# EAGLE board CT_schematic (EAGLE 7.6.0)

Size 100 x 80 mm. Coordinates in mm from the lower left corner, seen from the top.
Outline: 0,0 100,0 100,80 0,80 0,0
Copper layers (1*16): Top 0.035mm / dielectric 1.5mm / Bottom 0.035mm
Design rules "default": minimum track width 10mil, minimum drill 24mil, track to track 8mil, track to pad 8mil, pad to pad 8mil, via to via 8mil, smd to smd 8mil, copper to edge 40mil, drill to drill 8mil, minimum pad ring 10mil, minimum via ring 8mil, stop-mask expansion 4mil, vias tented up to drill 0mil, thermal gap 10mil

## Footprints (pad centres in the part's own frame; a part is rotated, then mirrored left to right if it is on the bottom)
C0603 = smd 0.8 x 0.8: 1 -0.762,0; 2 0.762,0
C0402 = smd 0.5 x 0.5: 1 -0.508,0; 2 0.508,0
C0805 = smd 1.2 x 1.3: 1 -1.016,0; 2 1.016,0
C1206 = smd 1.3 x 1.6: 1 -1.524,0; 2 1.524,0
2220 = smd 1.85 x 5.5: 1 -2.55,0; 2 2.55,0
R0603 = smd 0.8 x 0.8: 1 -0.762,0; 2 0.762,0
EXV-9H = smd 3.505 x 1.676: 1 -2.857,0; 2 2.857,0
L0603 = smd 0.8 x 0.8: 1 -0.762,0; 2 0.762,0
L1210 = smd 1.2 x 2.5: 1 -1.524,0; 2 1.524,0
DR1040 = smd 1.6 x 3.2: 1 -4.458,0; 2 4.458,0
PJ-037B_PACKAGE = drill 3.7 square: 1 12,0 | drill 3.2 square: 2 6,0
LQFP176 = smd 0.3 x 1.2: 1 -10.75,-12.75; 2 -10.25,-12.75; 3 -9.75,-12.75; 4 -9.25,-12.75; 5 -8.75,-12.75; 6 -8.25,-12.75; 7 -7.75,-12.75; 8 -7.25,-12.75; 9 -6.75,-12.75; 10 -6.25,-12.75; 11 -5.75,-12.75; 12 -5.25,-12.75; 13 -4.75,-12.75; 14 -4.25,-12.75; 15 -3.75,-12.75; 16 -3.25,-12.75; 17 -2.75,-12.75; 18 -2.25,-12.75; 19 -1.75,-12.75; 20 -1.25,-12.75; 21 -0.75,-12.75; 22 -0.25,-12.75; 23 0.25,-12.75; 24 0.75,-12.75; 25 1.25,-12.75; 26 1.75,-12.75; 27 2.25,-12.75; 28 2.75,-12.75; 29 3.25,-12.75; 30 3.75,-12.75; 31 4.25,-12.75; 32 4.75,-12.75; 33 5.25,-12.75; 34 5.75,-12.75; 35 6.25,-12.75; 36 6.75,-12.75; 37 7.25,-12.75; 38 7.75,-12.75; 39 8.25,-12.75; 40 8.75,-12.75; 41 9.25,-12.75; 42 9.75,-12.75; 43 10.25,-12.75; 44 10.75,-12.75; 89 10.75,12.75; 90 10.25,12.75; 91 9.75,12.75; 92 9.25,12.75; 93 8.75,12.75; 94 8.25,12.75; 95 7.75,12.75; 96 7.25,12.75; 97 6.75,12.75; 98 6.25,12.75; 99 5.75,12.75; 100 5.25,12.75; 101 4.75,12.75; 102 4.25,12.75; 103 3.75,12.75; 104 3.25,12.75; 105 2.75,12.75; 106 2.25,12.75; 107 1.75,12.75; 108 1.25,12.75; 109 0.75,12.75; 110 0.25,12.75; 111 -0.25,12.75; 112 -0.75,12.75; 113 -1.25,12.75; 114 -1.75,12.75; 115 -2.25,12.75; 116 -2.75,12.75; 117 -3.25,12.75; 118 -3.75,12.75; 119 -4.25,12.75; 120 -4.75,12.75; 121 -5.25,12.75; 122 -5.75,12.75; 123 -6.25,12.75; 124 -6.75,12.75; 125 -7.25,12.75; 126 -7.75,12.75; 127 -8.25,12.75; 128 -8.75,12.75; 129 -9.25,12.75; 130 -9.75,12.75; 131 -10.25,12.75; 132 -10.75,12.75 | smd 1.2 x 0.3: 45 12.75,-10.75; 46 12.75,-10.25; 47 12.75,-9.75; 48 12.75,-9.25; 49 12.75,-8.75; 50 12.75,-8.25; 51 12.75,-7.75; 52 12.75,-7.25; 53 12.75,-6.75; 54 12.75,-6.25; 55 12.75,-5.75; 56 12.75,-5.25; 57 12.75,-4.75; 58 12.75,-4.25; 59 12.75,-3.75; 60 12.75,-3.25; 61 12.75,-2.75; 62 12.75,-2.25; 63 12.75,-1.75; 64 12.75,-1.25; 65 12.75,-0.75; 66 12.75,-0.25; 67 12.75,0.25; 68 12.75,0.75; 69 12.75,1.25; 70 12.75,1.75; 71 12.75,2.25; 72 12.75,2.75; 73 12.75,3.25; 74 12.75,3.75; 75 12.75,4.25; 76 12.75,4.75; 77 12.75,5.25; 78 12.75,5.75; 79 12.75,6.25; 80 12.75,6.75; 81 12.75,7.25; 82 12.75,7.75; 83 12.75,8.25; 84 12.75,8.75; 85 12.75,9.25; 86 12.75,9.75; 87 12.75,10.25; 88 12.75,10.75; 133 -12.75,10.75; 134 -12.75,10.25; 135 -12.75,9.75; 136 -12.75,9.25; 137 -12.75,8.75; 138 -12.75,8.25; 139 -12.75,7.75; 140 -12.75,7.25; 141 -12.75,6.75; 142 -12.75,6.25; 143 -12.75,5.75; 144 -12.75,5.25; 145 -12.75,4.75; 146 -12.75,4.25; 147 -12.75,3.75; 148 -12.75,3.25; 149 -12.75,2.75; 150 -12.75,2.25; 151 -12.75,1.75; 152 -12.75,1.25; 153 -12.75,0.75; 154 -12.75,0.25; 155 -12.75,-0.25; 156 -12.75,-0.75; 157 -12.75,-1.25; 158 -12.75,-1.75; 159 -12.75,-2.25; 160 -12.75,-2.75; 161 -12.75,-3.25; 162 -12.75,-3.75; 163 -12.75,-4.25; 164 -12.75,-4.75; 165 -12.75,-5.25; 166 -12.75,-5.75; 167 -12.75,-6.25; 168 -12.75,-6.75; 169 -12.75,-7.25; 170 -12.75,-7.75; 171 -12.75,-8.25; 172 -12.75,-8.75; 173 -12.75,-9.25; 174 -12.75,-9.75; 175 -12.75,-10.25; 176 -12.75,-10.75
SSOP-28 = smd 1.5 x 0.4: 1 -3.625,4.225; 2 -3.625,3.575; 3 -3.625,2.925; 4 -3.625,2.275; 5 -3.625,1.625; 6 -3.625,0.975; 7 -3.625,0.325; 8 -3.625,-0.325; 9 -3.625,-0.975; 10 -3.625,-1.625; 11 -3.625,-2.275; 12 -3.625,-2.925; 13 -3.625,-3.575; 14 -3.625,-4.225; 15 3.625,-4.225; 16 3.625,-3.575; 17 3.625,-2.925; 18 3.625,-2.275; 19 3.625,-1.625; 20 3.625,-0.975; 21 3.625,-0.325; 22 3.625,0.325; 23 3.625,0.975; 24 3.625,1.625; 25 3.625,2.275; 26 3.625,2.925; 27 3.625,3.575; 28 3.625,4.225
FCI_10118193-0001LF = smd 0.4 x 1.35: 1 -1.3,2.675; 2 -0.65,2.675; 3 0,2.675; 4 0.65,2.675; 5 1.3,2.675 | smd 1.6 x 1.4: 6 -3.2,2.45; 7 3.2,2.45 | smd 1.9 x 1.9: 8 -1.2,0; 9 1.2,0 | hole 0.5: -3.3,0; 3.3,0
SSOP-20 = smd 1.651 x 0.432: 1 -3.48,2.925; 2 -3.48,2.275; 3 -3.48,1.625; 4 -3.48,0.975; 5 -3.48,0.325; 6 -3.48,-0.325; 7 -3.48,-0.975; 8 -3.48,-1.625; 9 -3.48,-2.275; 10 -3.48,-2.925; 11 3.48,-2.925; 12 3.48,-2.275; 13 3.48,-1.625; 14 3.48,-0.975; 15 3.48,-0.325; 16 3.48,0.325; 17 3.48,0.975; 18 3.48,1.625; 19 3.48,2.275; 20 3.48,2.925
HTSS-105-01-G-D = drill 1 pad 1.8 square: 1 0,0 | drill 1 pad 1.8: 2 0,2.54; 3 2.54,0; 4 2.54,2.54; 5 5.08,0; 6 5.08,2.54; 7 7.62,0; 8 7.62,2.54; 9 10.16,0; 10 10.16,2.54
TFBGA-153 = smd 0.3 x 0.3: A1 -3.25,3.25; A2 -2.75,3.25; A3 -2.25,3.25; A4 -1.75,3.25; A5 -1.25,3.25; A6 -0.75,3.25; A7 -0.25,3.25; A8 0.25,3.25; A9 0.75,3.25; A10 1.25,3.25; A11 1.75,3.25; A12 2.25,3.25; A13 2.75,3.25; A14 3.25,3.25; B1 -3.25,2.75; B2 -2.75,2.75; B3 -2.25,2.75; B4 -1.75,2.75; B5 -1.25,2.75; B6 -0.75,2.75; B7 -0.25,2.75; B8 0.25,2.75; B9 0.75,2.75; B10 1.25,2.75; B11 1.75,2.75; B12 2.25,2.75; B13 2.75,2.75; B14 3.25,2.75; C1 -3.25,2.25; C2 -2.75,2.25; C3 -2.25,2.25; C4 -1.75,2.25; C5 -1.25,2.25; C6 -0.75,2.25; C7 -0.25,2.25; C8 0.25,2.25; C9 0.75,2.25; C10 1.25,2.25; C11 1.75,2.25; C12 2.25,2.25; C13 2.75,2.25; C14 3.25,2.25; D1 -3.25,1.75; D2 -2.75,1.75; D3 -2.25,1.75; D4 -1.75,1.75; D12 2.25,1.75; D13 2.75,1.75; D14 3.25,1.75; E1 -3.25,1.25; E2 -2.75,1.25; E3 -2.25,1.25; E5 -1.25,1.25; E6 -0.75,1.25; E7 -0.25,1.25; E8 0.25,1.25; E9 0.75,1.25; E10 1.25,1.25; E12 2.25,1.25; E13 2.75,1.25; E14 3.25,1.25; F1 -3.25,0.75; F2 -2.75,0.75; F3 -2.25,0.75; F5 -1.25,0.75; F10 1.25,0.75; F12 2.25,0.75; F13 2.75,0.75; F14 3.25,0.75; G1 -3.25,0.25; G2 -2.75,0.25; G3 -2.25,0.25; G5 -1.25,0.25; G10 1.25,0.25; G12 2.25,0.25; G13 2.75,0.25; G14 3.25,0.25; H1 -3.25,-0.25; H2 -2.75,-0.25; H3 -2.25,-0.25; H5 -1.25,-0.25; H10 1.25,-0.25; H12 2.25,-0.25; H13 2.75,-0.25; H14 3.25,-0.25; J1 -3.25,-0.75; J2 -2.75,-0.75; J3 -2.25,-0.75; J5 -1.25,-0.75; J10 1.25,-0.75; J12 2.25,-0.75; J13 2.75,-0.75; J14 3.25,-0.75; K1 -3.25,-1.25; K2 -2.75,-1.25; K3 -2.25,-1.25; K5 -1.25,-1.25; K6 -0.75,-1.25; K7 -0.25,-1.25; K8 0.25,-1.25; K9 0.75,-1.25; K10 1.25,-1.25; K12 2.25,-1.25; K13 2.75,-1.25; K14 3.25,-1.25; L1 -3.25,-1.75; L2 -2.75,-1.75; L3 -2.25,-1.75; L12 2.25,-1.75; L13 2.75,-1.75; L14 3.25,-1.75; M1 -3.25,-2.25; M2 -2.75,-2.25; M3 -2.25,-2.25; M4 -1.75,-2.25; M5 -1.25,-2.25; M6 -0.75,-2.25; M7 -0.25,-2.25; M8 0.25,-2.25; M9 0.75,-2.25; M10 1.25,-2.25; M11 1.75,-2.25; M12 2.25,-2.25; M13 2.75,-2.25; M14 3.25,-2.25; N1 -3.25,-2.75; N2 -2.75,-2.75; N3 -2.25,-2.75; N4 -1.75,-2.75; N5 -1.25,-2.75; N6 -0.75,-2.75; N7 -0.25,-2.75; N8 0.25,-2.75; N9 0.75,-2.75; N10 1.25,-2.75; N11 1.75,-2.75; N12 2.25,-2.75; N13 2.75,-2.75; N14 3.25,-2.75; P1 -3.25,-3.25; P2 -2.75,-3.25; P3 -2.25,-3.25; P4 -1.75,-3.25; P5 -1.25,-3.25; P6 -0.75,-3.25; P7 -0.25,-3.25; P8 0.25,-3.25; P9 0.75,-3.25; P10 1.25,-3.25; P11 1.75,-3.25; P12 2.25,-3.25; P13 2.75,-3.25; P14 3.25,-3.25
TSSOP20-I = smd 0.4 x 1.35: 1 -2.925,-2.875; 2 -2.275,-2.875; 3 -1.625,-2.875; 4 -0.975,-2.875; 5 -0.325,-2.875; 6 0.325,-2.875; 7 0.975,-2.875; 8 1.625,-2.875; 9 2.275,-2.875; 10 2.925,-2.875; 11 2.925,2.875; 12 2.275,2.875; 13 1.625,2.875; 14 0.975,2.875; 15 0.325,2.875; 16 -0.325,2.875; 17 -0.975,2.875; 18 -1.625,2.875; 19 -2.275,2.875; 20 -2.925,2.875
182-009-MALE = drill 1.194 pad 1.524 octagon: 1 -5.537,10.923; 2 -2.769,10.923; 3 0,10.923; 4 2.769,10.923; 5 5.537,10.923; 6 -4.153,8.08; 7 -1.384,8.08; 8 1.384,8.08; 9 4.153,8.08 | hole 3.048: -12.446,9.501; 12.446,9.501
ABS07-32.768KHZ-7-T = smd 1.1 x 2.4: 1 -2.5,0; 2 0,0
ABLS-25.000MHZ-B2F-T = smd 5.6 x 2.8: 1 -3.81,0; 2 5.69,0
ASFL1 = smd 1.7 x 1.5: 1 -1.27,-1.1; 2 1.27,-1.1; 3 1.27,1.1; 4 -1.27,1.1
WSON-8 = smd 0.3 x 0.6: 1 -0.75,0; 2 0.05,0; 3 0.85,0; 4 1.65,0; 5 1.65,3.8; 6 0.85,3.8; 7 0.05,3.8; 8 -0.75,3.8 | smd 3 x 2.6: PAD 0.45,1.9
QFN-16_EP = smd 0.805 x 0.3: 1 -1.452,0.75; 2 -1.452,0.25; 3 -1.452,-0.25; 4 -1.452,-0.75; 9 1.452,-0.75; 10 1.452,-0.25; 11 1.452,0.25; 12 1.452,0.75 | smd 0.3 x 0.805: 5 -0.75,-1.452; 6 -0.25,-1.452; 7 0.25,-1.452; 8 0.75,-1.452; 13 0.75,1.452; 14 0.25,1.452; 15 -0.25,1.452; 16 -0.75,1.452 | smd 1.55 x 1.55: 17 0,0
QFN-38_UHF = smd 0.75 x 0.3: 1 -2.4,2.75; 2 -2.4,2.25; 3 -2.4,1.75; 4 -2.4,1.25; 6 -2.4,0.25; 7 -2.4,-0.25; 8 -2.4,-0.75; 9 -2.4,-1.25; 10 -2.4,-1.75; 11 -2.4,-2.25; 12 -2.4,-2.75; 20 2.4,-2.75; 21 2.4,-2.25; 22 2.4,-1.75; 23 2.4,-1.25; 24 2.4,-0.75; 25 2.4,-0.25; 26 2.4,0.25; 27 2.4,0.75; 28 2.4,1.25; 29 2.4,1.75; 30 2.4,2.25; 31 2.4,2.75 | smd 0.758 x 0.3: 5 -2.4,0.75 | smd 0.3 x 0.75: 13 -1.5,-3.4; 14 -1,-3.4; 15 -0.5,-3.4; 16 0,-3.4; 17 0.5,-3.4; 18 1,-3.4; 19 1.5,-3.4; 32 1.5,3.4; 33 1,3.4; 34 0.5,3.4; 35 0,3.4; 36 -0.5,3.4; 37 -1,3.4; 38 -1.5,3.4 | smd 3.2 x 5.2: 39 0,0
IRF8306MTRPBF = smd 0.9 x 1.85: 1 0,0; 2 0,-2.35; 6 6.4,0; 7 6.4,-2.35 | smd 0.75 x 0.75: 3 1.75,-1.175 | smd 1.45 x 0.87: 4 3.5,-0.565; 5 3.5,-1.785
SW_4-1437565-2 = smd 1.4 x 2.1: 1 -2.23,4.55; 2 -2.23,-4.55; 3 2.23,4.55; 4 2.23,-4.55
LGM67K-G1J2-24-Z = smd 0.8 x 1.4: A -2,0; C 0,0
NC7SZ125M5X = smd 1.3 x 0.7: 1 -1.3,0.95; 2 -1.3,0; 3 -1.3,-0.95; 4 1.3,-0.95; 5 1.3,0.95

## Placement (x,y rotation side)
C1  1e-06  [C0603]  -22.86,88.9 0 top  (outside the outline)
C2  1e-07  [C0603]  -26.67,88.9 0 top  (outside the outline)
C3  1e-07  [C0603]  -30.48,88.9 0 top  (outside the outline)
C4  1e-07  [C0603]  -34.29,88.9 0 top  (outside the outline)
C5  1e-07  [C0603]  -38.1,88.9 0 top  (outside the outline)
C6  1e-07  [C0603]  -41.91,88.9 0 top  (outside the outline)
C7  1e-07  [C0603]  -45.72,88.9 0 top  (outside the outline)
C8  1e-07  [C0603]  -49.53,88.9 0 top  (outside the outline)
C9  1e-07  [C0603]  -53.34,88.9 0 top  (outside the outline)
C10  1e-07  [C0603]  -57.15,88.9 0 top  (outside the outline)
C11  1e-07  [C0603]  -60.96,88.9 0 top  (outside the outline)
C12  1e-07  [C0603]  -64.77,88.9 0 top  (outside the outline)
C13  1e-07  [C0603]  -68.58,88.9 0 top  (outside the outline)
C14  1e-07  [C0603]  -72.39,88.9 0 top  (outside the outline)
C15  1e-07  [C0603]  -76.2,88.9 0 top  (outside the outline)
C16  1e-07  [C0603]  -80.01,88.9 0 top  (outside the outline)
C17  1e-07  [C0603]  -83.82,88.9 0 top  (outside the outline)
C18  4.7e-06  [C0603]  -90.17,83.82 0 top  (outside the outline)
C19  1e-07  [C0603]  -87.63,88.9 0 top  (outside the outline)
C20  1e-08  [C0603]  -91.44,88.9 0 top  (outside the outline)
C21  1e-06  [C0603]  -95.25,88.9 0 top  (outside the outline)
C22  1e-07  [C0603]  -15.24,93.98 0 top  (outside the outline)
C23  1e-07  [C0603]  -19.05,93.98 0 top  (outside the outline)
C24  1e-07  [C0603]  -22.86,93.98 0 top  (outside the outline)
C25  1e-11  [C0402]  -83.82,93.98 0 top  (outside the outline)
C26  1e-11  [C0402]  -87.63,93.98 0 top  (outside the outline)
C27  1e-11  [C0402]  -91.44,93.98 0 top  (outside the outline)
C28  1e-11  [C0402]  -95.25,93.98 0 top  (outside the outline)
C29  1e-07  [C0402]  -15.24,99.06 0 top  (outside the outline)
C30  4.7e-06  [C0805]  -40.64,72.39 0 top  (outside the outline)
C31  1e-07  [C0402]  -19.05,99.06 0 top  (outside the outline)
C32  1e-07  [C0402]  -22.86,99.06 0 top  (outside the outline)
C33  1e-06  [C0603]  -26.67,93.98 0 top  (outside the outline)
C34  1e-06  [C0603]  -30.48,93.98 0 top  (outside the outline)
C35  1e-06  [C0603]  -34.29,93.98 0 top  (outside the outline)
C36  4.7e-06  [C0805]  -45.72,72.39 0 top  (outside the outline)
C37  1e-07  [C0402]  -26.67,99.06 0 top  (outside the outline)
C38  2.2e-06  [C0603]  -93.98,83.82 0 top  (outside the outline)
C39  2.2e-06  [C0603]  -97.79,83.82 0 top  (outside the outline)
C40  1e-07  [C0402]  -30.48,99.06 0 top  (outside the outline)
C41  1e-07  [C0402]  -34.29,99.06 0 top  (outside the outline)
C42  2.2e-06  [C0603]  -15.24,88.9 0 top  (outside the outline)
C43  1e-07  [C0402]  -38.1,99.06 0 top  (outside the outline)
C44  1e-07  [C0402]  -41.91,99.06 0 top  (outside the outline)
C45  1e-07  [C0402]  -45.72,99.06 0 top  (outside the outline)
C46  1e-07  [C0402]  -49.53,99.06 0 top  (outside the outline)
C47  1e-07  [C0402]  -53.34,99.06 0 top  (outside the outline)
C48  1e-07  [C0402]  -57.15,99.06 0 top  (outside the outline)
C49  1e-07  [C0402]  -60.96,99.06 0 top  (outside the outline)
C50  1e-07  [C0402]  -64.77,99.06 0 top  (outside the outline)
C51  1e-07  [C0402]  -68.58,99.06 0 top  (outside the outline)
C52  1e-07  [C0402]  -72.39,99.06 0 top  (outside the outline)
C53  1e-07  [C0402]  -76.2,99.06 0 top  (outside the outline)
C54  1e-08  [C0402]  -80.01,99.06 0 top  (outside the outline)
C55  1e-08  [C0402]  -83.82,99.06 0 top  (outside the outline)
C56  1e-05  [C1206]  -16.51,72.39 0 top  (outside the outline)
C57  1e-05  [C0805]  -50.8,72.39 0 top  (outside the outline)
C58  1e-05  [C0805]  -55.88,72.39 0 top  (outside the outline)
C59  1e-06  [C0603]  -38.1,93.98 0 top  (outside the outline)
C60  1e-07  [C0402]  -87.63,99.06 0 top  (outside the outline)
C61  6.8e-05  [2220]  -93.98,48.26 0 top  (outside the outline)
C62  1e-08  [C0402]  -91.44,99.06 0 top  (outside the outline)
C63  1e-05  [C1206]  -22.86,72.39 0 top  (outside the outline)
C64  1e-05  [C0805]  -60.96,72.39 0 top  (outside the outline)
C65  1e-07  [C0402]  -95.25,99.06 0 top  (outside the outline)
C66  2.2e-06  [C0603]  -19.05,88.9 0 top  (outside the outline)
C67  2.45e-08  [R0603]  -40.64,78.74 0 top  (outside the outline)
C68  2.8258362168397e-09  [R0603]  -71.12,72.39 0 top  (outside the outline)
C69  7.105e-09  [R0603]  -83.82,72.39 0 top  (outside the outline)
C70  0.0001  [EXV-9H]  -17.78,66.04 0 top  (outside the outline)
C71  0.0001  [EXV-9H]  -29.21,66.04 0 top  (outside the outline)
C72  1e-08  [C0402]  -15.24,104.14 0 top  (outside the outline)
C73  1e-08  [C0402]  -19.05,104.14 0 top  (outside the outline)
F1  240.0  [L0603]  -41.91,93.98 0 top  (outside the outline)
I1  1.5e-05  [L1210]  -91.44,66.04 0 top  (outside the outline)
I2  3.8e-06  [DR1040]  -93.98,33.02 0 top  (outside the outline)
J1  PJ-037B  [PJ-037B_PACKAGE]  -52.07,34.29 0 top  (outside the outline)
R2  1000.0  [R0603]  -45.72,93.98 0 top  (outside the outline)
R7  4700.0  [R0603]  -49.53,93.98 0 top  (outside the outline)
R8  4700.0  [R0603]  -53.34,93.98 0 top  (outside the outline)
R9  10000.0  [R0603]  -45.72,78.74 0 top  (outside the outline)
R10  10000.0  [R0603]  -50.8,78.74 0 top  (outside the outline)
R11  10000.0  [R0603]  -55.88,78.74 0 top  (outside the outline)
R12  4700.0  [R0603]  -57.15,93.98 0 top  (outside the outline)
R13  10000.0  [R0603]  -60.96,78.74 0 top  (outside the outline)
R14  10000.0  [R0603]  -66.04,78.74 0 top  (outside the outline)
R15  100000.0  [R0603]  -88.9,72.39 0 top  (outside the outline)
R16  100000.0  [R0603]  -93.98,72.39 0 top  (outside the outline)
R17  100000.0  [R0603]  -15.24,78.74 0 top  (outside the outline)
R18  34000.0  [R0603]  -71.12,78.74 0 top  (outside the outline)
R19  34000.0  [R0603]  -76.2,78.74 0 top  (outside the outline)
R20  34000.0  [R0603]  -81.28,78.74 0 top  (outside the outline)
R21  34000.0  [R0603]  -86.36,78.74 0 top  (outside the outline)
R22  34000.0  [R0603]  -91.44,78.74 0 top  (outside the outline)
R23  34000.0  [R0603]  -96.52,78.74 0 top  (outside the outline)
R24  34000.0  [R0603]  -15.24,83.82 0 top  (outside the outline)
R25  34000.0  [R0603]  -20.32,83.82 0 top  (outside the outline)
R26  34000.0  [R0603]  -25.4,83.82 0 top  (outside the outline)
R27  34000.0  [R0603]  -30.48,83.82 0 top  (outside the outline)
R28  100000.0  [R0603]  -20.32,78.74 0 top  (outside the outline)
R29  100000.0  [R0603]  -25.4,78.74 0 top  (outside the outline)
R30  200.0  [R0603]  -60.96,93.98 0 top  (outside the outline)
R31  1000.0  [R0603]  -64.77,93.98 0 top  (outside the outline)
R32  20000.0  [R0603]  -35.56,83.82 0 top  (outside the outline)
R33  91000.0  [R0603]  -40.64,83.82 0 top  (outside the outline)
R34  300000.0  [R0603]  -30.48,78.74 0 top  (outside the outline)
R35  100000.0  [R0603]  -35.56,78.74 0 top  (outside the outline)
R36  200.0  [R0603]  -68.58,93.98 0 top  (outside the outline)
R37  1000.0  [R0603]  -72.39,93.98 0 top  (outside the outline)
R38  10000.0  [R0603]  -45.72,83.82 0 top  (outside the outline)
R39  75000.0  [R0603]  -50.8,83.82 0 top  (outside the outline)
R40  10000.0  [R0603]  -55.88,83.82 0 top  (outside the outline)
R41  10000.0  [R0603]  -60.96,83.82 0 top  (outside the outline)
R42  95300.0  [R0603]  -66.04,83.82 0 top  (outside the outline)
R43  95300.0  [R0603]  -71.12,83.82 0 top  (outside the outline)
R44  10000.0  [R0603]  -76.2,83.82 0 top  (outside the outline)
R45  10000.0  [R0603]  -81.28,83.82 0 top  (outside the outline)
R46  10000.0  [R0603]  -86.36,83.82 0 top  (outside the outline)
R47  86418.181818182  [R0603]  -78.74,72.39 0 top  (outside the outline)
U1  STM32F767IIT6  [LQFP176]  -26.67,13.97 0 top  (outside the outline)
U2  FT232RL-REEL  [SSOP-28]  -20.32,35.56 0 top  (outside the outline)
U3  10118193-0001LF  [FCI_10118193-0001LF]  -76.2,57.15 0 top  (outside the outline)
U4  MAX3218EAP+T  [SSOP-20]  -85.09,46.99 0 top  (outside the outline)
U5  HTSS-105-01-G-D  [HTSS-105-01-G-D]  -27.94,46.99 0 top  (outside the outline)
U6  mtfc4gmcdm  [TFBGA-153]  -86.36,8.89 0 top  (outside the outline)
U7  SP3203ECY-L/TR  [TSSOP20-I]  -83.82,33.02 0 top  (outside the outline)
U8  182-009-113R531  [182-009-MALE]  -63.5,6.35 0 top  (outside the outline)
U9  ST3241EBPR  [SSOP-28]  -31.75,35.56 0 top  (outside the outline)
U10  HTSS-105-01-G-D  [HTSS-105-01-G-D]  -46.99,46.99 0 top  (outside the outline)
U11  ABS07-32.768KHZ-7-T  [ABS07-32.768KHZ-7-T]  -71.12,66.04 0 top  (outside the outline)
U12  ABLS-25.000MHZ-B2F-T  [ABLS-25.000MHZ-B2F-T]  -48.26,66.04 0 top  (outside the outline)
U13  ASFL1-12MHZ-NCS  [ASFL1]  -67.31,57.15 0 top  (outside the outline)
U14  LP3878SDX-ADJ/NOPB  [WSON-8]  -30.48,55.88 0 top  (outside the outline)
U15  LTC3601EUD#PBF  [QFN-16_EP]  -77.47,93.98 0 top  (outside the outline)
U16  LP3878SDX-ADJ/NOPB  [WSON-8]  -50.8,55.88 0 top  (outside the outline)
U17  LTC2928CUHF#PBF  [QFN-38_UHF]  -85.09,57.15 0 top  (outside the outline)
U18  IRF8306MTRPbF  [IRF8306MTRPBF]  -63.5,49.53 0 top  (outside the outline)
U19  IRF8306MTRPbF  [IRF8306MTRPBF]  -78.74,49.53 0 top  (outside the outline)
U20  4-1437565-2  [SW_4-1437565-2]  -68.58,34.29 0 top  (outside the outline)
U21  Q65110A2395  [LGM67K-G1J2-24-Z]  -80.01,66.04 0 top  (outside the outline)
U22  nc7sz125m5x  [NC7SZ125M5X]  -27.94,72.39 0 top  (outside the outline)
U23  nc7sz125m5x  [NC7SZ125M5X]  -34.29,72.39 0 top  (outside the outline)

## Library data of the parts
C1-C73 F1 I1 I2 J1 R2 R7-R47 U1-U23 = circuit_tree

## Nets
CLK_CRYSTAL_U1_9: C25.1 U1.9 U11.1
CLK_CRYSTAL_U1_10: C26.1 U1.10 U11.2
CLK_CRYSTAL_U1_29: C27.1 U1.29 U12.1
CLK_CRYSTAL_U1_30: C28.1 U1.30 U12.2
CLK_U2_27: U2.27 U13.3
GND: C1.2 C2.2 C3.2 C4.2 C5.2 C6.2 C7.2 C8.2 C9.2 C10.2 C11.2 C12.2 C13.2 C14.2 C15.2 C16.2 C17.2 C18.2 C19.2 C20.2 C21.2 C22.2 C23.2 C24.2 C25.2 C26.2 C27.2 C28.2 C29.2 C30.2 C31.2 C32.2 C33.2 C34.2 C35.2 C37.2 C38.2 C39.2 C40.2 C41.2 C42.2 C43.2 C44.2 C47.2 C48.2 C49.2 C52.2 C53.2 C54.2 C55.2 C56.2 C57.2 C58.2 C59.2 C61.1 C61.2 C62.2 C63.2 C64.2 C65.2 C66.2 C67.2 C68.2 C69.2 C70.2 C71.2 C72.2 C73.2 J1.2 R2.2 R9.2 R14.2 R31.2 R32.2 R34.2 R37.2 R39.2 R42.2 R43.2 R44.2 R45.2 R46.2 U1.14 U1.22 U1.37 U1.61 U1.71 U1.90 U1.102 U1.113 U1.126 U1.135 U1.148 U1.158 U2.7 U2.18 U2.21 U2.25 U2.26 U3.5 U3.6 U3.7 U3.8 U3.9 U4.5 U4.17 U4.20 U5.9 U6.C4 U6.E7 U6.G5 U6.H10 U6.K8 U6.N2 U6.N5 U6.P4 U6.P6 U7.18 U8.5 U9.23 U9.25 U10.9 U13.2 U14.3 U14.PAD U15.1 U15.9 U15.17 U16.3 U16.PAD U17.8 U17.9 U17.10 U17.12 U17.13 U17.24 U17.25 U17.30 U17.32 U17.39 U21.C U22.1 U22.3 U23.1 U23.3
NET_U1_31: R8.1 U1.31 U23.4
NET_U1_39: C20.1 C21.1 F1.1 U1.38 U1.39
NET_U1_48: R11.1 U1.48
NET_U1_125: C24.1 U1.125
NET_U1_166: R9.1 U1.166
NET_U1_171: R10.1 U1.171
NET_U1_175: U21.A
NET_U1_176: U20.3 U20.4
NET_U2_14: R13.1 U2.14
NET_U2_17: C31.1 U2.17
NET_U2_19: R14.1 U2.19
NET_U3_1: R12.1 U3.1
NET_U3_2: U2.16 U3.2
NET_U3_3: U2.15 U3.3
NET_U3_19: R12.2
NET_U4_1: I1.1 U4.1
NET_U4_2: R15.1 U4.2
NET_U4_3: R16.1 U4.3
NET_U4_4: R17.1 U4.4
NET_U4_15: C35.1 U4.15
NET_U4_16: C36.2 U4.16
NET_U4_18: C36.1 U4.18
NET_U4_19: C34.1 U4.19
NET_U5_3: U4.12 U5.3
NET_U5_4: U4.11 U5.4
NET_U5_5: U4.14 U5.5
NET_U5_6: U4.13 U5.6
NET_U6_C2: C39.1 C40.1 U6.C2
NET_U6_K5: R7.1 U6.K5 U22.4
NET_U7_1: C45.1 U7.1
NET_U7_2: C47.1 U7.2
NET_U7_3: C45.2 U7.3
NET_U7_4: C46.1 U7.4
NET_U7_5: C46.2 U7.5
NET_U7_6: C48.1 U7.6
NET_U7_20: U7.20
NET_U8_2: U7.14 U8.2
NET_U8_3: U7.17 U8.3
NET_U8_7: U7.13 U8.7
NET_U8_8: U7.16 U8.8
NET_U9_1: C51.1 U9.1
NET_U9_2: C51.2 U9.2
NET_U9_3: C53.1 U9.3
NET_U9_22: R28.1 U9.22
NET_U9_24: C50.2 U9.24
NET_U9_27: C52.1 U9.27
NET_U9_28: C50.1 U9.28
NET_U10_3: U9.4 U10.3
NET_U10_4: U9.5 U10.4
NET_U10_5: U9.9 U10.5
NET_U10_6: U9.10 U10.6
NET_U14_1: C55.1 U14.1
NET_U14_6: R30.2 R31.1 U14.6
NET_U14_8: R29.1 U14.8
NET_U15_3: C60.2 I2.1 U15.3 U15.4
NET_U15_6: C60.1 U15.6
NET_U15_7: C59.1 U15.7 U15.12
NET_U15_10: R34.1 U15.10
NET_U15_11: R32.1 R33.1 U15.11
NET_U15_14: U15.14
NET_U15_ATNET_3: I2.2 R33.2
NET_U16_1: C62.1 U16.1
NET_U16_6: R36.2 R37.1 U16.6
NET_U16_8: R35.1 U16.8
NET_U17_3: R45.1 U17.3
NET_U17_6: R42.1 U17.6
NET_U17_7: R43.1 U17.7
NET_U17_16: R44.1 R47.1 U17.16
NET_U17_18: R41.1 U17.18
NET_U17_19: R40.1 U17.19 U17.20
NET_U17_21: R38.1 R39.1 U17.21 U22.2 U23.2
NET_U17_22: C65.1 R38.2 R40.2 R41.2 U17.11 U17.22
NET_U17_26: C68.1 U17.26
NET_U17_27: C67.1 U17.27
NET_U17_28: C69.1 U17.28
NET_U17_38: R46.1 U17.38
NET_U18_3: U17.2 U18.3
NET_U19_3: U17.37 U19.3
NET_U20_1: R2.1 U20.1 U20.2
PROC_SDMMC1_CK: R27.1 U1.141 U6.M6
PROC_SDMMC1_CMD: R26.1 U1.144 U6.M5
PROC_SDMMC1_D0: R18.1 U1.117 U6.A3
PROC_SDMMC1_D1: R19.1 U1.118 U6.A4
PROC_SDMMC1_D2: R20.1 U1.139 U6.A5
PROC_SDMMC1_D3: R21.1 U1.140 U6.B2
PROC_SDMMC1_D4: R22.1 U1.167 U6.B3
PROC_SDMMC1_D5: R23.1 U1.168 U6.B4
PROC_SDMMC1_D6: R24.1 U1.115 U6.B5
PROC_SDMMC1_D7: R25.1 U1.116 U6.B6
PROC_UART4_CTS: U1.56 U7.8
PROC_UART4_RTS: U1.94 U7.10
PROC_UART4_RX: U1.11 U7.11
PROC_UART4_TX: U1.128 U7.7
PROC_UART7_CTS: U1.27 U4.8
PROC_UART7_RTS: U1.26 U4.10
PROC_UART7_RX: U1.24 U4.9
PROC_UART7_TX: U1.25 U4.7
PROC_UART8_CTS: U1.104 U2.3
PROC_UART8_RTS: U1.105 U2.11
PROC_UART8_RX: U1.169 U2.1
PROC_UART8_TX: U1.170 U2.5
PROC_USART1_CTS: U1.122 U9.13
PROC_USART1_RTS: U1.123 U9.18
PROC_USART1_RX: U1.95 U9.19
PROC_USART1_TX: U1.120 U9.14
VCC_10V8: C66.1 C70.1 C71.1 J1.1 R47.2 U17.23 U18.1 U18.2 U18.6 U18.7 U19.1 U19.2 U19.6 U19.7
VCC_S1_10V8: C56.1 C58.1 R29.2 U14.4 U15.15 U15.16 U18.4 U18.5
VCC_S2_10V8: C63.1 R35.2 U16.4 U19.4 U19.5
VCC_TIER1_1V2: C23.1 C57.1 R30.1 U1.81 U14.5
VCC_TIER1_3V3: C1.1 C2.1 C3.1 C4.1 C5.1 C6.1 C7.1 C8.1 C9.1 C10.1 C11.1 C12.1 C13.1 C14.1 C15.1 C16.1 C17.1 C18.1 C19.1 C22.1 C29.1 C30.1 C32.1 C33.1 C37.1 C38.1 C41.1 C42.1 C43.1 C44.1 C49.1 C54.1 C61.2 C72.1 C73.1 F1.2 I1.2 I2.2 R7.2 R8.2 R10.2 R11.2 R13.2 R15.2 R16.2 R17.2 R18.2 R19.2 R20.2 R21.2 R22.2 R23.2 R24.2 R25.2 R26.2 R27.2 R28.2 R33.2 U1.6 U1.15 U1.23 U1.36 U1.49 U1.62 U1.72 U1.82 U1.91 U1.103 U1.114 U1.127 U1.136 U1.149 U1.159 U1.172 U2.4 U2.20 U4.6 U6.C6 U6.E6 U6.F5 U6.J10 U6.K9 U6.M4 U6.N4 U6.P3 U6.P5 U7.12 U7.19 U9.26 U13.4 U15.8 U22.5 U23.5
VCC_TIER2_1V2: C64.1 R36.1 U16.5

## Tracks (layer width: path | path; a pad name or v marks a point on that pad's centre or on a via)
CLK_CRYSTAL_U1_9  (2 unrouted)
CLK_CRYSTAL_U1_10  (2 unrouted)
CLK_CRYSTAL_U1_29  (2 unrouted)
CLK_CRYSTAL_U1_30  (2 unrouted)
CLK_U2_27  (1 unrouted)
GND  (144 unrouted)
NET_U1_31  (2 unrouted)
NET_U1_39  (4 unrouted)
NET_U1_48  (1 unrouted)
NET_U1_125  (1 unrouted)
NET_U1_166  (1 unrouted)
NET_U1_171  (1 unrouted)
NET_U1_176  (1 unrouted)
NET_U2_14  (1 unrouted)
NET_U2_17  (1 unrouted)
NET_U2_19  (1 unrouted)
NET_U3_1  (1 unrouted)
NET_U3_2  (1 unrouted)
NET_U3_3  (1 unrouted)
NET_U4_1  (1 unrouted)
NET_U4_2  (1 unrouted)
NET_U4_3  (1 unrouted)
NET_U4_4  (1 unrouted)
NET_U4_15  (1 unrouted)
NET_U4_16  (1 unrouted)
NET_U4_18  (1 unrouted)
NET_U4_19  (1 unrouted)
NET_U5_3  (1 unrouted)
NET_U5_4  (1 unrouted)
NET_U5_5  (1 unrouted)
NET_U5_6  (1 unrouted)
NET_U6_C2  (2 unrouted)
NET_U6_K5  (2 unrouted)
NET_U7_1  (1 unrouted)
NET_U7_2  (1 unrouted)
NET_U7_3  (1 unrouted)
NET_U7_4  (1 unrouted)
NET_U7_5  (1 unrouted)
NET_U7_6  (1 unrouted)
NET_U8_2  (1 unrouted)
NET_U8_3  (1 unrouted)
NET_U8_7  (1 unrouted)
NET_U8_8  (1 unrouted)
NET_U9_1  (1 unrouted)
NET_U9_2  (1 unrouted)
NET_U9_3  (1 unrouted)
NET_U9_22  (1 unrouted)
NET_U9_24  (1 unrouted)
NET_U9_27  (1 unrouted)
NET_U9_28  (1 unrouted)
NET_U10_3  (1 unrouted)
NET_U10_4  (1 unrouted)
NET_U10_5  (1 unrouted)
NET_U10_6  (1 unrouted)
NET_U14_1  (1 unrouted)
NET_U14_6  (2 unrouted)
NET_U14_8  (1 unrouted)
NET_U15_3  (3 unrouted)
NET_U15_6  (1 unrouted)
NET_U15_7  (2 unrouted)
NET_U15_10  (1 unrouted)
NET_U15_11  (2 unrouted)
NET_U15_ATNET_3  (1 unrouted)
NET_U16_1  (1 unrouted)
NET_U16_6  (2 unrouted)
NET_U16_8  (1 unrouted)
NET_U17_3  (1 unrouted)
NET_U17_6  (1 unrouted)
NET_U17_7  (1 unrouted)
NET_U17_16  (2 unrouted)
NET_U17_18  (1 unrouted)
NET_U17_19  (2 unrouted)
NET_U17_21  (4 unrouted)
NET_U17_22  (5 unrouted)
NET_U17_26  (1 unrouted)
NET_U17_27  (1 unrouted)
NET_U17_28  (1 unrouted)
NET_U17_38  (1 unrouted)
NET_U18_3  (1 unrouted)
NET_U19_3  (1 unrouted)
NET_U20_1  (2 unrouted)
PROC_SDMMC1_CK  (2 unrouted)
PROC_SDMMC1_CMD  (2 unrouted)
PROC_SDMMC1_D0  (2 unrouted)
PROC_SDMMC1_D1  (2 unrouted)
PROC_SDMMC1_D2  (2 unrouted)
PROC_SDMMC1_D3  (2 unrouted)
PROC_SDMMC1_D4  (2 unrouted)
PROC_SDMMC1_D5  (2 unrouted)
PROC_SDMMC1_D6  (2 unrouted)
PROC_SDMMC1_D7  (2 unrouted)
PROC_UART4_CTS  (1 unrouted)
PROC_UART4_RTS  (1 unrouted)
PROC_UART4_RX  (1 unrouted)
PROC_UART4_TX  (1 unrouted)
PROC_UART7_CTS  (1 unrouted)
PROC_UART7_RTS  (1 unrouted)
PROC_UART7_RX  (1 unrouted)
PROC_UART7_TX  (1 unrouted)
PROC_UART8_CTS  (1 unrouted)
PROC_UART8_RTS  (1 unrouted)
PROC_UART8_RX  (1 unrouted)
PROC_UART8_TX  (1 unrouted)
PROC_USART1_CTS  (1 unrouted)
PROC_USART1_RTS  (1 unrouted)
PROC_USART1_RX  (1 unrouted)
PROC_USART1_TX  (1 unrouted)
VCC_10V8  (13 unrouted)
VCC_S1_10V8  (7 unrouted)
VCC_S2_10V8  (4 unrouted)
VCC_TIER1_1V2  (4 unrouted)
VCC_TIER1_3V3  (92 unrouted)
VCC_TIER2_1V2  (2 unrouted)